# Altium PCB controller_V1.0.PcbDoc (part 7 of 8)
Units mm, origin at the board's own origin, x right, y up, seen from the top; angles counter-clockwise.
Board outline 284.13 x 175.13 mm, 4 copper layers (Top Layer, GND, VCC, Bottom Layer); 496 components, 415 nets, 1682 pads, 750 vias.
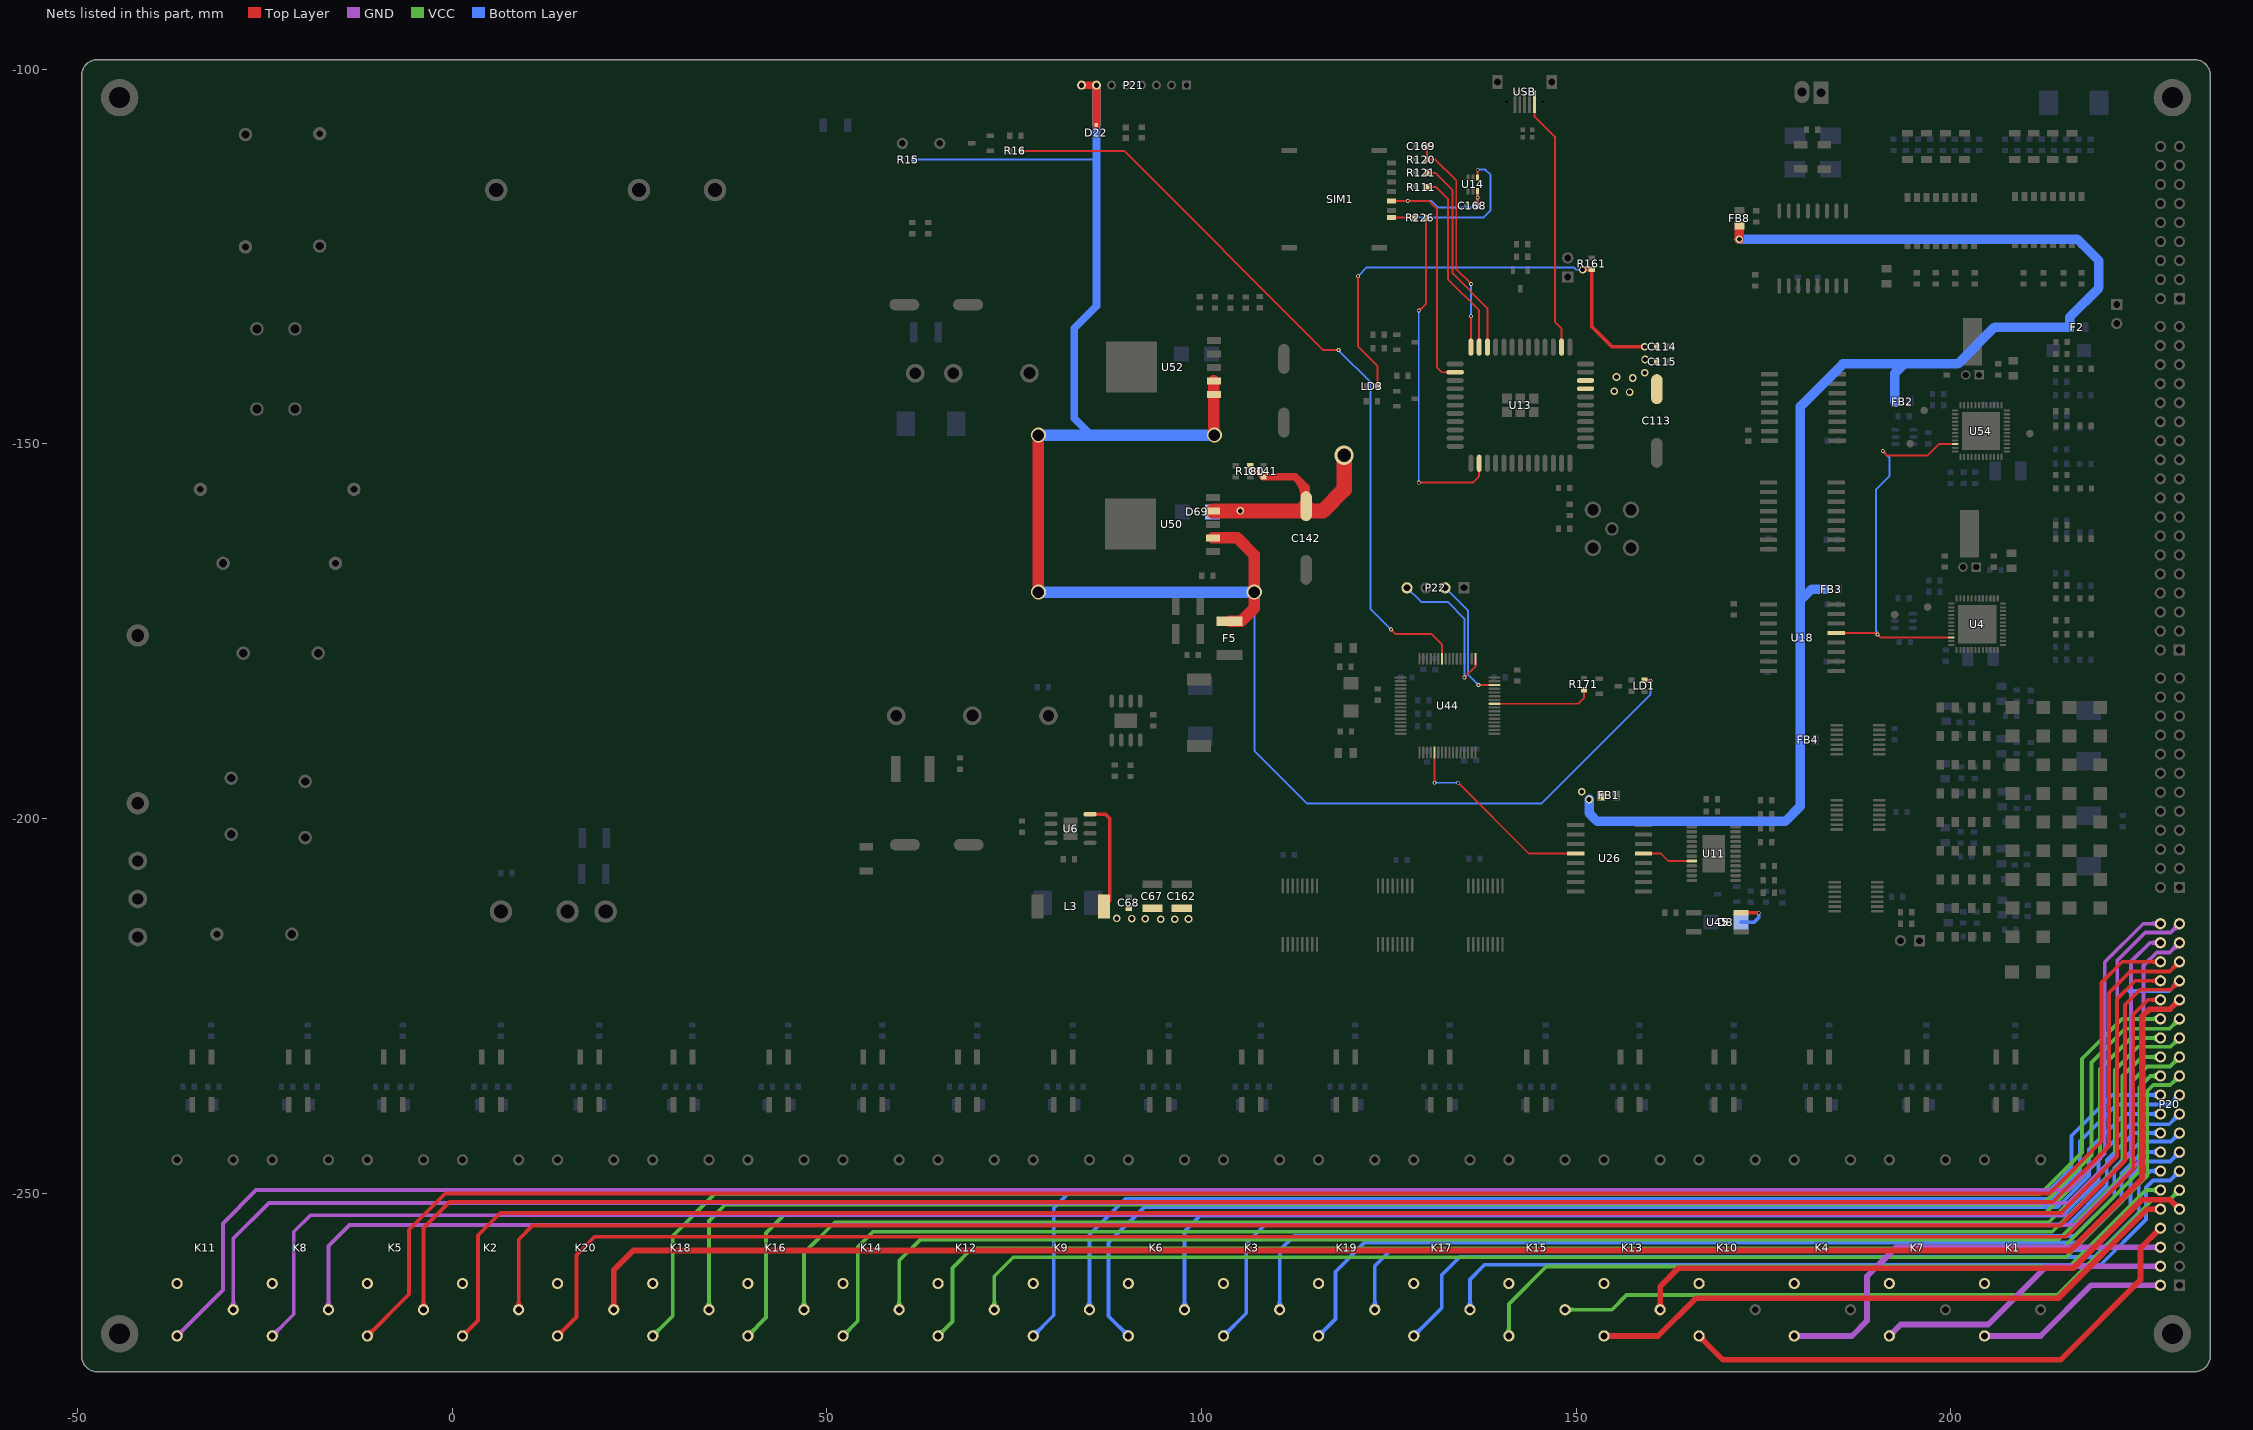
[diagram p9: the nets of this part, all layers, seen from the top]

## Via types
v1: diameter 0.508, hole 0.305, Top Layer to Bottom Layer, tented both sides, 596 vias
v2: diameter 1.016, hole 0.635, Top Layer to Bottom Layer, tented both sides, 65 vias
v3: diameter 0.6, hole 0.3, Top Layer to Bottom Layer, 50 vias
v4: diameter 0.762, hole 0.508, Top Layer to Bottom Layer, tented both sides, 29 vias
v5: diameter 2.032, hole 1.524, Top Layer to Bottom Layer, tented both sides, 4 vias
v6: diameter 3.048, hole 2.032, Top Layer to Bottom Layer, tented both sides, 3 vias
v7: diameter 1.5, hole 1, Top Layer to Bottom Layer, 2 vias
v8: diameter 2.54, hole 1.778, Top Layer to Bottom Layer, tented both sides, 1 vias

## Nets (pads, with @x,y where several pads share a name; then routed paths per layer and width w, separated by ;. In a path a pad name is that pad's centre, name@x,y a point inside that pad or via, vN(x,y) a via of type N, cw(c..) or ccw(c..) an arc to the next point about the centre after c; other vN are vias at no path point) (continued)
RELAY_A5: K13.1 P20.9 | length 80.5
  Top Layer w0.762: K13.1@160.967,-265.306 ccw(c160.337,-264.676) 161.228,-264.676 ccw(c162.119,-264.676) K13.1@161.489,-265.306 ; K13.1@161.228,-265.567 161.228,-262.458 163.641,-260.045 216.357,-260.045 225.515,-250.888 229.288,-250.888 P20.9@230.546,-252.146 ; P20.9@230.177,-252.146 ccw(c229.287,-252.146) 229.916,-251.516 ccw(c230.546,-250.886) P20.9@230.546,-251.777
RELAY_A6: K15.1 P20.11 | length 92.4
  VCC w0.508: K15.1@148.53,-265.567 154.777,-265.567 156.743,-263.601 214.249,-263.601 226.924,-250.927 228.346,-250.927 229.226,-250.927 P20.11@230.546,-249.606 ; K15.1@148.881,-265.918 cw(c149.728,-266.765) 149.728,-265.567 cw(c149.728,-264.37) K15.1@148.881,-265.216 ; P20.11@230.05,-249.606 cw(c228.853,-249.606) 229.7,-250.453 cw(c230.546,-251.299) P20.11@230.546,-250.102
RELAY_A7: K17.1 P20.13 | length 111
  Bottom Layer w0.508: K17.1@135.482,-265.216 ccw(c134.635,-264.37) 135.832,-264.37 ccw(c137.03,-264.37) K17.1@136.183,-265.216 ; K17.1@135.832,-265.567 135.832,-261.525 137.795,-259.563 220.04,-259.563 226.085,-253.517 226.085,-249.25 227.025,-248.31 229.302,-248.31 P20.13@230.546,-247.066 ; P20.13@230.05,-247.066 cw(c228.853,-247.066) 229.7,-247.913 cw(c230.546,-248.759) P20.13@230.546,-247.562
RELAY_A8: K19.1 P20.15 | length 125.6
  Bottom Layer w0.508: K19.1@122.784,-265.216 ccw(c121.937,-264.37) 123.135,-264.37 ccw(c124.332,-264.37) K19.1@123.485,-265.216 ; K19.1@123.135,-265.567 123.135,-259.745 125.247,-257.632 218.211,-257.632 224.003,-251.841 224.003,-247.853 226.085,-245.77 229.302,-245.77 P20.15@230.546,-244.526 ; P20.15@230.05,-244.526 cw(c228.853,-244.526) 229.7,-245.373 cw(c230.546,-246.219) P20.15@230.546,-245.022
RELAY_A9: K3.1 P20.17 | length 140.5
  Bottom Layer w0.508: K3.1@110.086,-265.216 ccw(c109.24,-264.37) 110.437,-264.37 ccw(c111.634,-264.37) K3.1@110.788,-265.216 ; K3.1@110.437,-265.567 110.437,-257.634 112.344,-255.727 216.535,-255.727 221.844,-250.419 221.844,-246.659 225.386,-243.117 229.415,-243.117 P20.17@230.546,-241.986 ; P20.17@230.05,-241.986 cw(c228.853,-241.986) 229.7,-242.833 cw(c230.546,-243.679) P20.17@230.546,-242.482
RELAY_A10: K6.1 P20.19 | length 155.3
  Bottom Layer w0.508: K6.1@97.389,-265.216 ccw(c96.542,-264.37) 97.739,-264.37 ccw(c98.937,-264.37) K6.1@98.09,-265.216 ; K6.1@97.739,-265.567 97.739,-255.118 99.822,-253.035 214.935,-253.035 219.735,-248.234 219.735,-245.11 224.028,-240.817 229.175,-240.817 P20.19@230.546,-239.446 ; P20.19@230.05,-239.446 cw(c228.853,-239.446) 229.7,-240.293 cw(c230.546,-241.139) P20.19@230.546,-239.942
RELAY_A11: K9.1 P20.21 | length 169.3
  Bottom Layer w0.508: K9.1@84.691,-265.216 ccw(c83.844,-264.37) 85.042,-264.37 ccw(c86.239,-264.37) K9.1@85.392,-265.216 ; K9.1@85.042,-265.567 85.042,-255.572 89.865,-250.749 213.614,-250.749 217.272,-247.091 217.272,-243.078 222.174,-238.176 229.276,-238.176 P20.21@230.546,-236.906 ; P20.21@230.05,-236.906 cw(c228.853,-236.906) 229.7,-237.753 cw(c230.546,-238.599) P20.21@230.546,-237.402
RELAY_A12: K12.1 P20.23 | length 184.2
  VCC w0.508: K12.1@71.993,-265.216 ccw(c71.146,-264.37) 72.344,-264.37 ccw(c73.541,-264.37) K12.1@72.695,-265.216 ; K12.1@72.344,-265.567 72.344,-261.107 74.879,-258.572 215.417,-258.572 226.238,-247.752 226.238,-236.398 227.051,-235.585 229.327,-235.585 P20.23@230.546,-234.366 ; P20.23@230.05,-234.366 cw(c228.853,-234.366) 229.7,-235.213 cw(c230.546,-236.059) P20.23@230.546,-234.862
RELAY_A13: K14.1 P20.25 | length 199.1
  VCC w0.508: K14.1@59.295,-265.216 ccw(c58.449,-264.37) 59.646,-264.37 ccw(c60.844,-264.37) K14.1@59.997,-265.216 ; K14.1@59.646,-265.567 59.646,-259.022 62.484,-256.184 214.427,-256.184 224.13,-246.482 224.13,-235.179 226.212,-233.096 229.276,-233.096 P20.25@230.546,-231.826 ; P20.25@230.05,-231.826 cw(c228.853,-231.826) 229.7,-232.673 cw(c230.546,-233.519) P20.25@230.546,-232.322
RELAY_A14: K16.1 P20.27 | length 213.6
  VCC w0.508: K16.1@46.598,-265.216 ccw(c45.751,-264.37) 46.948,-264.37 ccw(c48.146,-264.37) K16.1@47.299,-265.216 ; K16.1@46.948,-265.567 46.948,-258.004 51.054,-253.898 213.106,-253.898 221.92,-245.085 221.92,-233.553 224.993,-230.48 229.353,-230.48 P20.27@230.546,-229.286 ; P20.27@230.05,-229.286 cw(c228.853,-229.286) 229.7,-230.133 cw(c230.546,-230.979) P20.27@230.546,-229.782
RELAY_A15: K18.1 P20.29 | length 230.4
  VCC w0.508: K18.1@33.9,-265.216 ccw(c33.053,-264.37) 34.251,-264.37 ccw(c35.448,-264.37) K18.1@34.601,-265.216 ; K18.1@34.251,-265.567 34.251,-253.709 36.424,-251.536 212.242,-251.536 218.796,-244.983 218.796,-232.562 223.291,-228.067 229.226,-228.067 P20.29@230.546,-226.746 ; P20.29@230.05,-226.746 cw(c228.853,-226.746) 229.7,-227.593 cw(c230.546,-228.439) P20.29@230.546,-227.242
RELAY_A16: K20.1 P20.31 | length 244.7
  Top Layer w0.762: K20.1@21.292,-265.306 ccw(c20.662,-264.676) 21.553,-264.676 ccw(c22.444,-264.676) K20.1@21.814,-265.306 ; K20.1@21.553,-265.567 21.553,-260.26 24.155,-257.658 215.976,-257.658 225.552,-248.082 225.552,-226.441 226.529,-225.464 228.527,-225.464 228.541,-225.45 229.302,-225.45 P20.31@230.546,-224.206 ; P20.31@230.177,-224.206 cw(c229.287,-224.206) 229.916,-224.836 cw(c230.546,-225.466) P20.31@230.546,-224.575
RELAY_A17: K2.1 P20.33 | length 270.5
  Top Layer w0.508: K2.1@8.504,-265.216 ccw(c7.658,-264.37) 8.855,-264.37 ccw(c10.053,-264.37) K2.1@9.206,-265.216 ; K2.1@8.855,-265.567 8.855,-256.194 10.719,-254.33 214.655,-254.33 223.266,-245.72 223.266,-224.866 225.273,-222.86 229.353,-222.86 P20.33@230.546,-221.666 ; P20.33@230.05,-221.666 cw(c228.853,-221.666) 229.7,-222.513 cw(c230.546,-223.359) P20.33@230.546,-222.162
  Bottom Layer w0.508: 223.825,-223.037 229.175,-223.037 P20.33@230.546,-221.666 ; P20.33@230.05,-221.666 cw(c228.853,-221.666) 229.7,-222.513 cw(c230.546,-223.359) P20.33@230.546,-222.162
RELAY_A18: K5.1 P20.35 | length 275.8
  Top Layer w0.508: K5.1@-4.193,-265.216 ccw(c-5.04,-264.37) -3.843,-264.37 ccw(c-2.645,-264.37) K5.1@-3.492,-265.216 ; K5.1@-3.843,-265.567 -3.843,-254.66 -0.388,-251.206 213.639,-251.206 221.132,-243.713 221.132,-223.266 223.977,-220.421 229.251,-220.421 P20.35@230.546,-219.126 ; P20.35@230.05,-219.126 cw(c228.853,-219.126) 229.7,-219.973 cw(c230.546,-220.819) P20.35@230.546,-219.622
RELAY_A19: K8.1 P20.37 | length 291.1
  GND w0.508: K8.1@-16.891,-265.216 ccw(c-17.738,-264.37) -16.54,-264.37 ccw(c-15.343,-264.37) K8.1@-16.19,-265.216 ; K8.1@-16.54,-265.567 -16.54,-257.078 -13.741,-254.279 216.713,-254.279 225.755,-245.237 225.755,-219.634 227.508,-217.881 229.251,-217.881 P20.37@230.546,-216.586 ; P20.37@230.05,-216.586 cw(c228.853,-216.586) 229.7,-217.433 cw(c230.546,-218.279) P20.37@230.546,-217.082
RELAY_A20: K11.1 P20.39 | length 305.6
  GND w0.508: K11.1@-29.589,-265.216 ccw(c-30.435,-264.37) -29.238,-264.37 ccw(c-28.041,-264.37) K11.1@-28.887,-265.216 ; K11.1@-29.238,-265.567 -29.238,-256.083 -24.488,-251.333 215.722,-251.333 222.25,-244.805 222.25,-218.939 225.975,-215.214 226.136,-215.214 229.378,-215.214 P20.39@230.546,-214.046 ; P20.39@230.05,-214.046 cw(c228.853,-214.046) 229.7,-214.893 cw(c230.546,-215.739) P20.39@230.546,-214.542
RELAY_B1: K1.3 P20.2 | length 29.1
  GND w0.762: K1.3@204.519,-269.067 211.983,-269.067 218.745,-262.306 P20.2@228.006,-262.306 ; K1.3@204.78,-269.328 cw(c205.41,-269.958) 205.41,-269.067 cw(c205.41,-268.176) K1.3@204.78,-268.806 ; P20.2@227.745,-262.567 ccw(c227.116,-263.197) 227.116,-262.306 ccw(c227.116,-261.415) P20.2@227.745,-262.045
RELAY_B2: K4.3 P20.6 | length 60.1
  GND w0.762: K4.3@179.123,-269.067 186.817,-269.067 188.849,-267.035 188.849,-261.112 192.735,-257.226 P20.6@228.006,-257.226 ; K4.3@179.384,-269.328 cw(c180.014,-269.958) 180.014,-269.067 cw(c180.014,-268.176) K4.3@179.384,-268.806 ; P20.6@227.745,-257.487 ccw(c227.116,-258.117) 227.116,-257.226 ccw(c227.116,-256.335) P20.6@227.745,-256.965
RELAY_B3: K7.3 P20.4 | length 42.8
  GND w0.762: K7.3@191.821,-269.067 193.337,-267.551 205.016,-267.551 212.801,-259.766 P20.4@228.006,-259.766 ; K7.3@191.821,-268.698 ccw(c191.821,-267.807) 192.451,-268.437 ccw(c193.081,-269.067) K7.3@192.19,-269.067 ; P20.4@227.745,-260.027 ccw(c227.116,-260.657) 227.116,-259.766 ccw(c227.116,-258.875) P20.4@227.745,-259.505
RELAY_B4: K10.3 P20.8 | length 75.7
  Top Layer w0.508: K10.3@166.426,-269.067 K10.3@166.7,-269.067
  Top Layer w0.762: K10.3@166.426,-269.436 cw(c166.426,-270.327) 167.056,-269.697 cw(c167.685,-269.067) K10.3@166.795,-269.067 ; K10.3@166.426,-269.067 169.621,-272.263 214.655,-272.263 225.349,-261.569 225.349,-257.343 P20.8@228.006,-254.686 ; P20.8@227.637,-254.686 cw(c226.747,-254.686) 227.376,-255.316 cw(c228.006,-255.946) P20.8@228.006,-255.055
RELAY_B5: K13.3 P20.10 | length 84.1
  Top Layer w0.762: K13.3@153.728,-269.067 160.96,-269.067 165.994,-264.033 214.376,-264.033 226.263,-252.146 P20.10@228.006,-252.146 ; K13.3@153.989,-269.328 cw(c154.619,-269.958) 154.619,-269.067 cw(c154.619,-268.176) K13.3@153.989,-268.806 ; P20.10@227.745,-252.407 ccw(c227.116,-253.037) 227.116,-252.146 ccw(c227.116,-251.255) P20.10@227.745,-251.885
RELAY_B6: K15.3 P20.12 | length 101.3
  VCC w0.508: K15.3@140.679,-268.716 ccw(c139.833,-267.87) 141.03,-267.87 ccw(c142.228,-267.87) K15.3@141.381,-268.716 ; K15.3@141.03,-269.067 141.03,-264.811 146.025,-259.817 215.849,-259.817 226.06,-249.606 P20.12@228.006,-249.606 ; P20.12@227.656,-249.957 ccw(c226.809,-250.803) 226.809,-249.606 ccw(c226.809,-248.408) P20.12@227.656,-249.255
RELAY_B7: K17.3 P20.14 | length 117.5
  Bottom Layer w0.508: K17.3@128.332,-269.067 132.08,-265.32 132.08,-260.934 134.468,-258.547 219.177,-258.547 225.12,-252.603 225.12,-248.615 226.67,-247.066 P20.14@228.006,-247.066 ; K17.3@128.332,-268.571 ccw(c128.332,-267.374) 129.179,-268.22 ccw(c130.026,-269.067) K17.3@128.828,-269.067 ; P20.14@227.656,-247.417 ccw(c226.809,-248.263) 226.809,-247.066 ccw(c226.809,-245.868) P20.14@227.656,-246.715
RELAY_B8: K19.3 P20.16 | length 132.2
  Bottom Layer w0.508: K19.3@115.635,-269.067 117.881,-266.82 117.881,-260.502 121.768,-256.616 217.348,-256.616 222.809,-251.155 222.809,-247.345 225.628,-244.526 P20.16@228.006,-244.526 ; K19.3@115.635,-268.571 ccw(c115.635,-267.374) 116.481,-268.22 ccw(c117.328,-269.067) K19.3@116.131,-269.067 ; P20.16@227.656,-244.877 ccw(c226.809,-245.723) 226.809,-244.526 ccw(c226.809,-243.328) P20.16@227.656,-244.175
RELAY_B9: K3.3 P20.18 | length 147.5
  Bottom Layer w0.508: K3.3@102.937,-269.067 105.969,-266.035 105.969,-256.718 108.509,-254.178 215.697,-254.178 220.828,-249.047 220.828,-245.618 224.46,-241.986 P20.18@228.006,-241.986 ; K3.3@102.937,-268.571 ccw(c102.937,-267.374) 103.784,-268.22 ccw(c104.63,-269.067) K3.3@103.433,-269.067 ; P20.18@227.656,-242.337 ccw(c226.809,-243.183) 226.809,-241.986 ccw(c226.809,-240.788) P20.18@227.656,-241.635
RELAY_B10: K6.3 P20.20 | length 166.8
  Bottom Layer w0.508: K6.3@89.743,-269.067 ccw(c88.546,-269.067) 89.393,-268.22 ccw(c90.239,-267.374) K6.3@90.239,-268.571 ; K6.3@90.239,-269.067 87.605,-266.433 87.605,-256.616 92.38,-251.841 214.3,-251.841 218.491,-247.65 218.491,-244.196 223.241,-239.446 P20.20@228.006,-239.446 ; P20.20@227.656,-239.797 ccw(c226.809,-240.643) 226.809,-239.446 ccw(c226.809,-238.248) P20.20@227.656,-239.095
RELAY_B11: K9.3 P20.22 | length 178.5
  Bottom Layer w0.508: K9.3@77.542,-269.067 80.289,-266.319 80.289,-251.993 82.55,-249.733 213.131,-249.733 216.129,-246.736 216.129,-242.341 221.564,-236.906 P20.22@228.006,-236.906 ; K9.3@77.542,-268.571 ccw(c77.542,-267.374) 78.388,-268.22 ccw(c79.235,-269.067) K9.3@78.038,-269.067 ; P20.22@227.656,-237.257 ccw(c226.809,-238.103) 226.809,-236.906 ccw(c226.809,-235.708) P20.22@227.656,-236.555
RELAY_B12: K12.3 P20.24 | length 192.1
  VCC w0.508: K12.3@64.844,-269.067 66.751,-267.16 66.751,-259.994 69.342,-257.404 214.909,-257.404 225.171,-247.142 225.171,-235.864 226.67,-234.366 P20.24@228.006,-234.366 ; K12.3@64.844,-268.571 ccw(c64.844,-267.374) 65.691,-268.22 ccw(c66.537,-269.067) K12.3@65.34,-269.067 ; P20.24@227.656,-234.717 ccw(c226.809,-235.563) 226.809,-234.366 ccw(c226.809,-233.168) P20.24@227.656,-234.015
RELAY_B13: K14.3 P20.26 | length 207.5
  VCC w0.508: K14.3@52.146,-269.067 54.127,-267.086 54.127,-257.2 56.159,-255.168 213.563,-255.168 222.961,-245.77 222.961,-234.391 225.527,-231.826 P20.26@228.006,-231.826 ; K14.3@52.146,-268.571 ccw(c52.146,-267.374) 52.993,-268.22 ccw(c53.84,-269.067) K14.3@52.642,-269.067 ; P20.26@227.656,-232.177 ccw(c226.809,-233.023) 226.809,-231.826 ccw(c226.809,-230.628) P20.26@227.656,-231.475
RELAY_B14: K16.3 P20.28 | length 222.4
  VCC w0.508: K16.3@39.448,-269.067 41.885,-266.631 41.885,-255.321 44.399,-252.806 212.522,-252.806 219.939,-245.389 219.939,-233.426 224.079,-229.286 P20.28@228.006,-229.286 ; K16.3@39.448,-268.571 ccw(c39.448,-267.374) 40.295,-268.22 ccw(c41.142,-269.067) K16.3@39.944,-269.067 ; P20.28@227.656,-229.637 ccw(c226.809,-230.483) 226.809,-229.286 ccw(c226.809,-228.088) P20.28@227.656,-228.935
RELAY_B15: K18.3 P20.30 | length 236.1
  VCC w0.508: K18.3@26.751,-269.067 29.413,-266.405 29.413,-255.727 35.001,-250.139 211.963,-250.139 217.526,-244.577 217.526,-232.08 222.86,-226.746 P20.30@228.006,-226.746 ; K18.3@26.751,-268.571 ccw(c26.751,-267.374) 27.597,-268.22 ccw(c28.444,-269.067) K18.3@27.247,-269.067 ; P20.30@227.656,-227.097 ccw(c226.809,-227.943) 226.809,-226.746 ccw(c226.809,-225.548) P20.30@227.656,-226.395
RELAY_B16: K20.3 P20.32 | length 253.3
  Top Layer w0.508: K20.3@14.053,-269.067 16.561,-266.559 16.561,-258.267 18.999,-255.829 215.392,-255.829 224.384,-246.837 224.384,-226.162 226.339,-224.206 P20.32@228.006,-224.206 ; K20.3@14.053,-268.571 ccw(c14.053,-267.374) 14.9,-268.22 ccw(c15.746,-269.067) K20.3@14.549,-269.067 ; P20.32@227.656,-224.557 ccw(c226.809,-225.403) 226.809,-224.206 ccw(c226.809,-223.008) P20.32@227.656,-223.855
RELAY_B17: K2.3 P20.34 | length 269.9
  Top Layer w0.508: K2.3@1.355,-269.067 3.429,-266.993 3.429,-255.626 6.401,-252.654 214.732,-252.654 218.669,-248.717 ; K2.3@1.355,-268.571 ccw(c1.355,-267.374) 2.202,-268.22 ccw(c3.049,-269.067) K2.3@1.851,-269.067 ; 218.084,-249.301 218.669,-248.717 ; P20.34@227.656,-222.017 ccw(c226.809,-222.863) 226.809,-221.666 ccw(c226.809,-220.468) P20.34@227.656,-221.315 ; P20.34@228.006,-221.666 224.638,-221.666 222.225,-224.079 222.225,-245.161 218.669,-248.717
RELAY_B18: K5.3 P20.36 | length 281.3
  Top Layer w0.508: K5.3@-11.343,-269.067 -5.791,-263.516 -5.791,-254.889 -0.94,-250.038 213.182,-250.038 220.142,-243.078 220.142,-221.894 222.91,-219.126 P20.36@228.006,-219.126 ; K5.3@-11.343,-268.571 ccw(c-11.343,-267.374) -10.496,-268.22 ccw(c-9.649,-269.067) K5.3@-10.847,-269.067 ; P20.36@227.656,-219.477 ccw(c226.809,-220.323) 226.809,-219.126 ccw(c226.809,-217.928) P20.36@227.656,-218.775
RELAY_B19: K8.3 P20.38 | length 299
  GND w0.508: K8.3@-24.04,-269.067 -21.158,-266.185 -21.158,-255.168 -18.948,-252.959 215.875,-252.959 224.079,-244.754 224.079,-219.1 226.593,-216.586 P20.38@228.006,-216.586 ; K8.3@-24.04,-268.571 ccw(c-24.04,-267.374) -23.194,-268.22 ccw(c-22.347,-269.067) K8.3@-23.544,-269.067 ; P20.38@227.656,-216.937 ccw(c226.809,-217.783) 226.809,-216.586 ccw(c226.809,-215.388) P20.38@227.656,-216.235
RELAY_B20: K11.3 P20.40 | length 311.5
  GND w0.508: K11.3@-36.738,-269.067 -30.632,-262.962 -30.632,-254.051 -26.187,-249.606 215.671,-249.606 220.574,-244.704 220.574,-219.177 225.704,-214.046 P20.40@228.006,-214.046 ; K11.3@-36.738,-268.571 ccw(c-36.738,-267.374) -35.891,-268.22 ccw(c-35.045,-269.067) K11.3@-36.242,-269.067 ; P20.40@227.656,-214.397 ccw(c226.809,-215.243) 226.809,-214.046 ccw(c226.809,-212.848) P20.40@227.656,-213.695
RELAY_C1: K1.2
RELAY_C2: K4.2
RELAY_C3: K7.2
RELAY_C4: K10.2
RELAY_C5: K13.2
RELAY_C6: K15.2
RELAY_C7: K17.2
RELAY_C8: K19.2
RELAY_C9: K3.2
RELAY_C10: K6.2
RELAY_C11: K9.2
RELAY_C12: K12.2
RELAY_C13: K14.2
RELAY_C14: K16.2
RELAY_C15: K18.2
RELAY_C16: K20.2
RELAY_C17: K2.2
RELAY_C18: K5.2
RELAY_C19: K8.2
RELAY_C20: K11.2
SCLK: U4.22 U18.13 U54.22 | length 54.9
  Top Layer w0.254: U18.13@184.732,-175.235 190.045,-175.235 190.627,-175.816 U4.22@200.095,-175.816 ; U18.13@185.716,-175.342 cw(c185.976,-175.603) 185.976,-175.235 cw(c185.976,-174.867) U18.13@185.716,-175.127 ; v1@190.246,-175.565 cw(c190.246,-175.878) 190.467,-175.656 ; v1@190.373,-175.438 ccw(c190.673,-175.438) 190.461,-175.65 ; v1@190.939,-151.079 cw(c190.939,-151.386) 191.156,-151.169 cw(c191.373,-150.952) v1@191.066,-150.952 ; v1(190.939,-150.952) 191.549,-151.562 196.901,-151.562 198.427,-150.035 U54.22@200.603,-150.035
  Bottom Layer w0.254: 190.043,-175.254 ccw(c190.43,-175.254) v1@190.156,-175.528 ; 190.043,-174.641 ccw(c191.043,-174.641) v1@190.336,-175.348 ; v1(190.246,-175.438) 190.043,-175.235 190.043,-156.083 191.821,-154.305 191.821,-151.834 v1(190.939,-150.952) ; v1@190.939,-151.079 cw(c190.939,-151.386) 191.156,-151.169 cw(c191.373,-150.952) v1@191.066,-150.952
SCLK_AO: U11.8 U26.13 | length 7.8
  Top Layer w0.254: U26.13@159.001,-204.673 161.315,-204.673 162.316,-205.674 U11.8@165.449,-205.674 ; U26.13@159.985,-204.781 cw(c160.246,-205.041) 160.246,-204.673 cw(c160.246,-204.305) U26.13@159.985,-204.565 ; U11.8@164.88,-205.743 ccw(c164.712,-205.91) 164.712,-205.674 ccw(c164.712,-205.437) U11.8@164.88,-205.604
SCLK_AO_MCU: U26.4 U44.21 | length 29.3
  Top Layer w0.254: v1@131.001,-195.133 ccw(c130.784,-194.916) 131.091,-194.916 ccw(c131.398,-194.916) v1@131.181,-195.133 ; v1(131.091,-195.223) U44.21@131.091,-191.178 ; v1@134.264,-195.35 cw(c134.264,-195.656) 134.481,-195.44 cw(c134.698,-195.223) v1@134.391,-195.223 ; v1(134.264,-195.223) 143.715,-204.673 145.415,-204.673 U26.4@149.959,-204.673 ; U26.4@148.975,-204.781 ccw(c148.715,-205.041) 148.715,-204.673 ccw(c148.715,-204.305) U26.4@148.975,-204.565
  Bottom Layer w0.254: v1(131.091,-195.223) v1(134.264,-195.223) ; v1@131.181,-195.313 cw(c131.398,-195.529) 131.398,-195.223 cw(c131.398,-194.916) v1@131.181,-195.133 ; v1@134.175,-195.313 ccw(c133.958,-195.529) 133.958,-195.223 ccw(c133.958,-194.916) v1@134.175,-195.133
SIM_CLK: C169.1 R120.2 U13.13 | length 35
  Top Layer w0.254: R120.2@129.939,-111.807 ccw(c129.552,-111.42) 130.099,-111.42 ; C169.1@129.941,-110.494 cw(c129.56,-110.875) 130.099,-110.875 cw(c130.637,-110.875) C169.1@130.256,-110.494 ; 130.099,-111.432 ccw(c130.628,-111.432) R120.2@130.254,-111.807 ; C169.1@130.099,-110.261 130.099,-112.037 R120.2@130.096,-112.039 131.216,-112.039 134.01,-114.833 134.01,-126.67 v1(135.992,-128.651) ; R120.2@130.254,-112.197 cw(c130.635,-112.578) 130.635,-112.039 cw(c130.635,-111.501) R120.2@130.254,-111.882 ; U13.13@135.828,-136.116 ccw(c135.49,-135.778) 135.968,-135.778 ccw(c136.446,-135.778) U13.13@136.108,-136.116 ; v1@135.865,-128.651 ccw(c135.558,-128.651) 135.775,-128.434 ccw(c135.992,-128.217) v1@135.992,-128.524 ; v1@135.878,-133.035 cw(c135.661,-133.252) 135.968,-133.252 cw(c136.274,-133.252) v1@136.057,-133.035 ; U13.13@135.968,-137.081 v1(135.968,-132.945)
  Bottom Layer w0.254: v1@135.878,-132.855 ccw(c135.661,-132.638) 135.968,-132.638 ccw(c136.274,-132.638) v1@136.057,-132.855 ; v1(135.968,-132.945) 135.968,-128.675 v1(135.992,-128.651) ; 135.968,-129.016 cw(c136.356,-129.016) v1@136.081,-128.741
SIM_DATA: R121.2 U13.11 | length 28.8
  Top Layer w0.254: R121.2@130.096,-113.817 131.191,-113.817 133.528,-116.154 133.528,-127.229 138.168,-131.868 U13.11@138.168,-137.081 ; R121.2@130.254,-113.975 cw(c130.635,-114.356) 130.635,-113.817 cw(c130.635,-113.279) R121.2@130.254,-113.66 ; U13.11@138.028,-136.116 ccw(c137.69,-135.778) 138.168,-135.778 ccw(c138.646,-135.778) U13.11@138.308,-136.116
SIM_PRE: R226.1 SIM1.8 U14.1 | length 26.4
  Top Layer w0.254: SIM1.8@125.346,-119.786 v1(127.533,-119.786) R226.1@128.473,-119.786 ; SIM1.8@125.776,-119.926 cw(c126.114,-120.264) 126.114,-119.786 cw(c126.114,-119.308) SIM1.8@125.776,-119.646 ; v1@127.444,-119.876 ccw(c127.227,-120.093) 127.227,-119.786 ccw(c127.227,-119.48) v1@127.444,-119.697 ; v1@127.623,-119.876 cw(c127.84,-120.093) 127.84,-119.786 cw(c127.84,-119.48) v1@127.623,-119.697 ; R226.1@128.316,-119.944 ccw(c127.935,-120.325) 127.935,-119.786 ccw(c127.935,-119.248) R226.1@128.316,-119.629 ; v1@136.778,-113.488 cw(c136.561,-113.705) 136.868,-113.705 cw(c137.174,-113.705) v1@136.957,-113.488 ; U14.1@136.868,-114.442 v1(136.868,-113.399)
  Bottom Layer w0.254: v1(127.533,-119.786) 137.617,-119.786 138.582,-118.821 138.582,-114.071 137.897,-113.386 v1@136.881,-113.386 ; v1@127.623,-119.876 cw(c127.84,-120.093) 127.84,-119.786 cw(c127.84,-119.48) v1@127.623,-119.697 ; v1@136.957,-113.488 cw(c137.206,-113.737) 137.206,-113.386 ; v1@136.957,-113.309 ccw(c137.143,-113.123) 137.143,-113.386
SIM_RST: R111.2 U13.12 | length 26.6
  Top Layer w0.254: R111.2@130.096,-115.722 131.318,-115.722 132.893,-117.297 132.893,-127.991 137.068,-132.165 U13.12@137.068,-137.081 ; R111.2@130.254,-115.88 cw(c130.635,-116.261) 130.635,-115.722 cw(c130.635,-115.184) R111.2@130.254,-115.565 ; U13.12@136.928,-136.116 ccw(c136.59,-135.778) 137.068,-135.778 ccw(c137.546,-135.778) U13.12@137.208,-136.116
SIOUT0: D8.2 U45.4 | length 5.7
  Top Layer w0.508: U45.4@172.032,-212.573 v1(174.396,-212.573)
  Bottom Layer w0.508: D8.2@171.993,-213.843 173.761,-213.843 174.396,-213.208 v1(174.396,-212.573)
SPEAKER: R16.2 U44.58 | length 105.9
  Top Layer w0.254: R16.2@75.922,-110.896 89.687,-110.896 116.256,-137.465 v1(118.288,-137.465) ; R16.2@76.08,-111.054 cw(c76.46,-111.435) 76.46,-110.896 cw(c76.46,-110.358) R16.2@76.08,-110.739 ; v1@118.198,-137.555 ccw(c117.981,-137.771) 117.981,-137.465 ccw(c117.981,-137.158) v1@118.198,-137.375 ; v1@125.292,-174.898 cw(c125.292,-175.205) 125.509,-174.988 cw(c125.726,-174.771) v1@125.419,-174.771 ; v1(125.292,-174.771) 125.908,-175.387 130.708,-175.387 132.091,-176.77 U44.58@132.091,-178.678
  Bottom Layer w0.254: v1@118.288,-137.592 cw(c118.288,-137.898) 118.505,-137.682 cw(c118.721,-137.465) v1@118.415,-137.465 ; v1(118.288,-137.465) 122.58,-141.757 122.58,-172.06 v1(125.292,-174.771) ; v1@125.165,-174.771 ccw(c124.859,-174.771) 125.075,-174.555 ccw(c125.292,-174.338) v1@125.292,-174.644
STATUS: R171.1 U44.41 | length 14.2
  Top Layer w0.254: U44.41@139.091,-184.678 150.322,-184.678 151.054,-183.947 R171.1@151.054,-182.829 ; R171.1@150.896,-182.987 cw(c150.515,-183.368) 151.054,-183.368 cw(c151.592,-183.368) R171.1@151.211,-182.987
SWCLK: P22.4 U44.49 | length 21.3
  Top Layer w0.254: v1(135.091,-181.167) 136.591,-179.667 U44.49@136.591,-178.678 ; v1@135.091,-181.04 ccw(c135.091,-180.733) 135.308,-180.95 ccw(c135.525,-181.167) v1@135.218,-181.167
  Bottom Layer w0.254: P22.4@127.429,-169.215 129.309,-171.094 132.867,-171.094 135.091,-173.318 v1(135.091,-181.167) ; v1@135.001,-181.077 ccw(c134.784,-180.86) 135.091,-180.86 ccw(c135.398,-180.86) v1@135.181,-181.077
SWDIO: P22.2 U44.46 | length 17.9
  Top Layer w0.254: v1(136.966,-182.178) U44.46@139.091,-182.178 ; v1@137.056,-182.268 cw(c137.273,-182.485) 137.273,-182.178 cw(c137.273,-181.872) v1@137.056,-182.088
  Bottom Layer w0.254: P22.2@132.509,-169.215 135.591,-172.297 135.591,-180.803 v1(136.966,-182.178) ; v1@136.839,-182.178 ccw(c136.533,-182.178) 136.749,-181.961 ccw(c136.966,-181.745) v1@136.966,-182.051
VBAT: C113.1 C114.2 C115.2 C141.2 C142.1 D69.2 LD3.1 R161.2 R180.1 U13.42 U13.43 U50.4 | length 109.8
  Top Layer w0.254: v1@120.814,-127.699 cw(c120.597,-127.916) 120.904,-127.916 cw(c121.211,-127.916) v1@120.994,-127.699 ; 120.904,-129.21 120.904,-129.54 ; v1(120.904,-127.61) 120.904,-129.54 ; LD3.1@123.36,-142.058 ccw(c122.979,-141.677) 123.518,-141.677 ccw(c124.056,-141.677) LD3.1@123.675,-142.058 ; LD3.1@123.518,-142.291 123.518,-139.647 120.904,-137.033 120.904,-129.54
  Top Layer w0.508: R180.1@106.5,-152.907 108,-154.407 C141.2@108.278,-154.407 ; R180.1@106.671,-152.907 ccw(c107.083,-152.907) R180.1@106.792,-153.199 ; 107.692,-154.099 ccw(c108.203,-153.589) C141.2@108.203,-154.311 ; v2@150.951,-126.671 R161.2@152.093,-126.671 152.093,-134.338 154.788,-137.033 v2(159.182,-137.033) ; v2@151.056,-126.926 cw(c151.67,-127.54) R161.2@151.67,-126.671 ; v2@159.002,-137.213 ccw(c158.569,-137.646) 158.569,-137.033 ccw(c158.569,-136.42) v2@159.002,-136.853
  Top Layer w1.016: C141.2@108.278,-154.407 112.519,-154.407 113.967,-155.854 C142.1@113.967,-158.31 ; 112.673,-154.56 cw(c110.16,-157.072) C142.1@113.713,-157.072
  Top Layer w2.032: U50.4@101.521,-158.938 v2(105.181,-158.938) C142.1@113.339,-158.938 ; C142.1@113.967,-158.31 C142.1@113.339,-158.938 ; v8(119.05,-151.511) 119.05,-156.108 116.22,-158.938 C142.1@113.339,-158.938
  Bottom Layer w0.254: v1(120.904,-127.61) 122.072,-126.441 149.705,-126.441 150.01,-126.746 v2(150.876,-126.746) ; v1@120.904,-127.483 ccw(c120.904,-127.176) 121.121,-127.393 ccw(c121.338,-127.61) v1@121.031,-127.61
  Bottom Layer w1.524: D69.2@101.457,-159.08 v2@105.065,-159.08
  other v2: 157.15,-143.078 155.092,-142.977 157.582,-141.199 155.397,-141.072 159.182,-140.487 159.212,-138.735
VBUS: U13.2 USB.1 | length 35
  Top Layer w0.254: USB.1@144.435,-104.326 144.435,-106.233 147.168,-108.966 147.168,-133.706 148.068,-134.606 U13.2@148.068,-137.081 ; U13.2@147.928,-136.116 ccw(c147.59,-135.778) 148.068,-135.778 ccw(c148.546,-135.778) U13.2@148.208,-136.116
VCC_5V: D22.2 F5.2 LD1.1 P21.7 P21.8 R15.1 U50.2 U52.1 U52.2 | length 275.9
  Top Layer w0.254: LD1.1@159.131,-181.559 159.182,-181.61 v1(159.944,-181.61) ; LD1.1@159.364,-181.717 cw(c159.622,-181.975) 159.622,-181.61 ; LD1.1@159.364,-181.402 ccw(c159.867,-180.898) v1@159.867,-181.61 ; v1@159.854,-181.7 ccw(c159.637,-181.917) 159.637,-181.61 ccw(c159.637,-181.303) v1@159.854,-181.52
  Top Layer w1.016: P21.8@83.991,-102.108 P21.7@85.991,-102.108 85.991,-107.385 D22.2@85.951,-107.425
  Top Layer w1.524: v5(78.229,-169.774) v5(78.229,-148.819) ; U50.2@101.521,-162.538 104.776,-162.538 107.058,-164.821 v5(107.058,-169.774) 107.058,-171.933 105.316,-173.675 F5.2@103.756,-173.675 ; v5@101.648,-148.742 U52.1@101.648,-143.383 U52.2@101.648,-141.583
  Bottom Layer w0.254: R15.1@61.592,-112.039 76.53,-112.039 ; R15.1@61.75,-112.197 cw(c62.131,-112.578) 62.131,-112.039 cw(c62.131,-111.501) R15.1@61.75,-111.882 ; 85.242,-112.039 76.53,-112.039 ; 85.991,-112.37 85.66,-112.039 76.53,-112.039 ; v5(107.058,-169.774) 107.058,-190.98 114.097,-198.018 145.364,-198.018 159.944,-183.439 v1(159.944,-181.61) ; v1@159.854,-181.7 cw(c159.637,-181.917) 159.944,-181.917 cw(c160.25,-181.917) v1@160.034,-181.7
  Bottom Layer w1.016: 85.268,-148.819 83.033,-146.583 83.033,-134.544 85.991,-131.586 85.991,-112.37 P21.7@85.991,-102.108
  Bottom Layer w1.524: v5(78.229,-169.774) v5(107.058,-169.774) ; v5(78.229,-148.819) 85.268,-148.819 v5(101.724,-148.819)
VCC_5V_ISO: C67.1 C68.1 C162.1 F2.1 FB1.1 FB2.1 FB3.1 FB4.1 FB8.2 L3.2 U6.4 | length 210.6
  Top Layer w0.508: U6.4@85.122,-199.441 87.196,-199.441 87.754,-200 87.754,-210.977 L3.2@86.992,-211.74
  Top Layer w1.27: v2(171.803,-122.685) FB8.2@171.803,-120.897
  Bottom Layer w1.27: v2(151.74,-197.46) 151.74,-199.288 152.832,-200.381 177.927,-200.381 179.959,-198.349 FB4.1@179.959,-189.509 179.959,-170.866 ; v2(171.803,-122.685) 216.919,-122.685 219.786,-125.552 219.786,-129.184 215.872,-133.099 215.872,-133.761 F2.1@215.872,-134.417 205.867,-134.417 200.965,-139.319 193.802,-139.319 ; FB3.1@183.032,-169.393 181.432,-169.393 179.959,-170.866 ; FB2.1@192.532,-144.348 192.532,-140.589 193.802,-139.319 ; 179.959,-170.866 179.959,-163.195 179.959,-144.983 185.623,-139.319 193.802,-139.319
  other v2: 94.564,-213.462 96.418,-213.462 98.273,-213.411 92.507,-213.385 90.678,-213.36 88.697,-213.335 150.749,-196.418
VEXT: R226.2 U13.24 | length 49.4
  Top Layer w0.254: v1(129.007,-155.169) 136.22,-155.169 137.068,-154.321 U13.24@137.068,-152.581 ; v1@129.007,-132.258 129.973,-131.291 R226.2@129.973,-119.786 ; v1@129.007,-132.055 ccw(c129.007,-131.564) 129.353,-131.911 ; v1@129.096,-155.258 cw(c129.313,-155.475) 129.313,-155.169 cw(c129.313,-154.862) v1@129.096,-155.079 ; R226.2@129.816,-120.019 cw(c129.435,-120.4) 129.973,-120.4 cw(c130.512,-120.4) R226.2@130.131,-120.019 ; U13.24@136.928,-153.546 cw(c136.59,-153.884) 137.068,-153.884 cw(c137.546,-153.884) U13.24@137.208,-153.546
  Bottom Layer w0.254: v1@128.917,-155.079 ccw(c128.7,-154.862) 129.007,-154.862 ccw(c129.313,-154.862) v1@129.096,-155.079 ; v1@128.917,-132.271 cw(c128.7,-132.488) 129.007,-132.488 cw(c129.313,-132.488) v1@129.096,-132.271 ; v1(129.007,-155.169) v1(129.007,-132.182)
VSIM: C168.2 SIM1.1 U13.14 U14.6 | length 48.2
  Top Layer w0.254: SIM1.1@125.346,-117.566 v1(127.533,-117.566) 130.368,-117.566 131.445,-118.643 131.445,-139.827 132.049,-140.431 U13.14@133.868,-140.431 ; SIM1.1@125.776,-117.706 cw(c126.114,-118.044) 126.114,-117.566 cw(c126.114,-117.088) SIM1.1@125.776,-117.426 ; v1@127.444,-117.656 ccw(c127.227,-117.873) 127.227,-117.566 ccw(c127.227,-117.26) v1@127.444,-117.477 ; v1@127.623,-117.656 cw(c127.84,-117.873) 127.84,-117.566 cw(c127.84,-117.26) v1@127.623,-117.477 ; U13.14@132.903,-140.571 ccw(c132.565,-140.909) 132.565,-140.431 ccw(c132.565,-139.953) U13.14@132.903,-140.291 ; C168.2@136.724,-118.004 ccw(c136.378,-117.658) 136.868,-117.658 ; v1@136.778,-117.184 cw(c136.561,-117.401) 136.868,-117.401 cw(c137.174,-117.401) v1@136.957,-117.184 ; v1@136.778,-117.004 ccw(c136.561,-116.787) 136.868,-116.787 ccw(c137.174,-116.787) v1@136.957,-117.004 ; 136.868,-117.589 ccw(c137.455,-117.589) C168.2@137.04,-118.004 ; U14.6@136.868,-116.292 v1(136.868,-117.094) 136.868,-118.223 C168.2@136.882,-118.237
  Bottom Layer w0.254: v1(127.533,-117.566) 130.698,-117.566 131.597,-118.466 136.068,-118.466 136.868,-117.666 v1(136.868,-117.094) ; v1@127.623,-117.656 cw(c127.84,-117.873) 127.84,-117.566 cw(c127.84,-117.26) v1@127.623,-117.477 ; v1@136.778,-117.184 cw(c136.561,-117.401) 136.868,-117.401 cw(c137.174,-117.401) v1@136.957,-117.184
pads on no net: P21.3 P21.6 SIM1.6 T1.1 T2.1 T3.1 T4.1 U1.3 U1.5 U2.12 U2.13 U2.14 U3.12 U3.13 U3.14 U4.17 U4.18 U4.19 U4.41 U4.42 U4.43 U4.44 U6.2 U6.3 U7.12 U7.13 U7.14 U10.5 U10.6 U10.11 U10.12 U11.6 U11.17 U11.18 U11.23 U12.11 U12.14 U13.5 U13.8 U13.9 U13.19 U13.20 U13.21 U13.22 U13.23 U13.25 U13.26 U13.28 U13.29 U13.30 U13.31 U13.32 U13.33 U13.38 U13.39 U13.44 U13.96 U13.97 U13.98 U16.4 U16.5 U16.6 U16.7 U16.9 U26.7 U44.2 U44.4 U44.8 U44.9 U44.10 U44.11 U51.2 U51.3 U54.17 U54.18 U54.19 U54.43 U54.44 U56.3 U56.5 USB.0 USB.6 USB.7 X2.3 X3.3
copper on no net:
  other v1: 165.075,-124.003 165.303,-113.919 165.176,-109.144 165.862,-103.276

## Polygon pours and split planes (outlines as drawn)
VCC_5V_ISO on VCC "Top Layer-No Net" (solid, remove dead copper, pour order 1008): 152.984,-195.428 149.936,-195.428 149.555,-195.809 149.301,-196.063 149.301,-197.104 149.301,-218.313 148.26,-219.354 147.269,-220.345 142.164,-220.345 101.93,-220.345 100.889,-219.304 100.381,-218.796 100.381,-212.75 100.381,-212.42 99.517,-211.557 99.39,-211.43 94.945,-211.43 86.817,-211.43 86.36,-211.887 85.877,-212.369 85.877,-213.538 85.877,-223.977 88.341,-226.441 89.535,-226.441 148.438,-226.441 153.213,-221.666 154.864,-220.015 154.864,-198.603 154.864,-197.307 152.883,-195.326
3.3V_MCU on VCC "Top Layer-No Net" (solid, remove dead copper, pour order 1007): 124.714,-178.054 124.765,-178.105 135.026,-178.105 137.185,-178.105 137.897,-178.816 138.811,-179.73 138.811,-182.169 138.811,-190.856 138.074,-191.592 137.592,-192.075 127.203,-192.075 122.784,-192.075 122.225,-191.516 121.641,-190.932 121.641,-187.884 121.641,-180.111 123.342,-178.41 123.698,-178.054 124.714,-178.054
VBAT on VCC "Top Layer-No Net" (solid, remove dead copper, pour order 1006): 118.44,-153.822 157.302,-153.822 161.265,-149.86 161.569,-149.555 161.569,-135.357 161.366,-135.357 159.283,-133.274 156.337,-133.274 155.651,-133.274 154.762,-134.163 153.086,-135.839 153.086,-139.217 153.086,-147.98 151.587,-149.479 151.308,-149.758 132.055,-149.758 117.17,-149.758 116.611,-150.317 116.51,-150.419 116.51,-151.994 116.51,-153.264 116.992,-153.746 117.069,-153.822 118.44,-153.822
3.3V_ISO on VCC "Top Layer-No Net" (solid, remove dead copper, pour order 1005): 111.709,-193.472 118.262,-193.472 118.872,-192.862 119.939,-191.795 119.939,-184.633 119.939,-165.76 121.844,-163.855 122.072,-163.627 132.588,-163.627 135.484,-163.627 138.1,-166.243 144.069,-172.212 151.816,-172.212 167.183,-172.212 169.215,-174.244 172.364,-177.394 172.364,-180.442 172.364,-181.051 173.431,-182.118 175.819,-182.118 177.495,-182.118 178.079,-181.534 178.562,-181.051 178.562,-179.375 178.562,-132.423 179.197,-131.788 181.064,-129.921 195.504,-129.921 219.05,-129.921 219.786,-129.184 220.015,-128.956 220.015,-126.771 177.927,-126.771 175.412,-129.286 172.212,-132.486 172.212,-142.392 172.212,-167.03 171.653,-167.589 170.79,-168.453 157.582,-168.453 147.879,-168.453 139.852,-160.426 137.947,-158.521 128.041,-158.521 119.431,-158.521 116.357,-155.448 113.386,-152.476 113.386,-141.453 113.386,-134.595 111.343,-132.552 110.998,-132.207 102.718,-132.207 102.286,-132.207 100.127,-134.366 99.492,-135.001 99.492,-140.284 99.492,-147.348 103.985,-151.841 111.963,-159.819 111.963,-193.472
VCC_5V_ISO on VCC "Top Layer-No Net" (solid, remove dead copper, pour order 1004): 87.503,-212.344 100.355,-212.344 100.355,-221.92 101.575,-223.139 101.676,-223.037 142.57,-223.037 147.523,-223.037 150.571,-219.989 153.111,-217.449 153.111,-203.403 153.111,-201.32 151.181,-199.39 149.708,-197.917 149.708,-196.113 149.708,-196.037 150.317,-195.428 150.419,-195.326 152.349,-195.326 152.883,-195.326 153.619,-196.063 154.788,-197.231 154.788,-200.685 154.788,-219.456 150.876,-223.368 148.336,-225.908 125.552,-225.908 89.891,-225.908 88.011,-224.028 87.503,-223.52 87.503,-212.344
3.3V_ISO_AD on VCC "Top Layer-No Net" (solid, pour order 1003): 210.185,-135.89 213.131,-135.89 213.843,-136.601 213.843,-140.335 213.843,-168.58 214.732,-169.469 214.782,-169.52 214.782,-178.638 213.233,-178.638 213.03,-178.435 213.03,-177.343 213.03,-162.281 212.522,-161.773 212.369,-161.62 212.369,-159.334 212.369,-138.963 212.217,-138.811 212.014,-138.608 211.328,-138.608 210.795,-138.608 210.668,-138.481 210.185,-137.998 210.185,-135.89
5VA on VCC "Top Layer-No Net" (solid, pour order 1002): 194.666,-143.548 194.678,-143.535 196.19,-143.535 196.418,-143.535 196.799,-143.916 196.835,-143.88 202.803,-143.88 203.236,-143.88 203.886,-143.231 204.681,-142.435 206.891,-142.435 207.434,-142.435 208.864,-143.866 208.991,-143.993 208.991,-145.009 199.923,-145.009 199.06,-145.872 198.907,-146.025 198.907,-149.581 198.907,-150.978 199.009,-151.079 200.177,-152.248 202.803,-152.248 206.654,-152.248 207.239,-152.832 207.188,-152.883 207.188,-153.949 207.188,-154.559 206.553,-155.194 206.477,-155.27 201.767,-155.27 199.771,-155.27 198.145,-156.896 197.891,-157.15 197.891,-165.811 197.891,-166.811 198.755,-167.674 199.28,-168.199 204.775,-168.199 205.74,-168.199 206.045,-168.504 205.938,-168.61 205.938,-170.113 205.926,-170.113 204.826,-171.213 204.722,-171.316 199.568,-171.316 199.568,-176.505 200,-176.936 200.889,-177.825 202.295,-177.825 203.211,-177.825 203.795,-178.41 204.013,-178.627 204.013,-179.857 204.013,-180.01 203.556,-180.467 203.2,-180.823 197.815,-180.823 197.815,-173.406 196.901,-172.491 194.691,-170.282 194.691,-143.548
5VD_F on VCC "Top Layer-No Net" (solid, pour order 1001): 155.677,-195.961 155.677,-206.172 158.826,-209.321 159.283,-209.779 163.271,-209.779 182.22,-209.779 185.395,-206.604 188.697,-203.302 188.697,-160.833 188.697,-139.268 188.163,-138.735 188.112,-138.786 184.252,-138.786 184.061,-138.786 182.956,-139.891 182.778,-140.068 182.778,-145.059 182.778,-204.241 179.527,-207.493 179.451,-207.416 164.973,-207.416 163.576,-207.416 161.341,-205.181 160.35,-204.191 160.35,-198.882 160.35,-196.723 159.842,-196.215 159.588,-195.961 155.677,-195.961
24V_F on VCC "Top Layer-No Net" (solid, pour order 1000): 226.111,-109.271 232.41,-109.271 232.588,-109.449 232.893,-109.753 232.893,-110.49 232.893,-209.245 232.639,-209.499 231.978,-210.16 231.191,-210.16 224.434,-210.16 221.793,-212.801 214.96,-219.634 214.96,-221.844 214.96,-240.589 212.903,-242.646 208.458,-247.091 205.105,-247.091 -38.938,-247.091 -40.818,-245.212 -40.564,-244.958 -40.564,-241.91 -40.564,-241.757 -39.776,-240.97 -39.421,-241.325 59.741,-241.325 59.741,-196.621 61.239,-195.123 61.824,-194.539 66.726,-194.539 68.605,-194.539 70.891,-196.825 72.136,-198.069 72.136,-202.692 72.136,-213.157 68.529,-216.764 66.015,-219.278 66.015,-231.927 66.015,-241.097 66.091,-241.173 71.069,-241.173 71.095,-241.198 133.401,-241.198 133.68,-240.919 134.569,-240.03 202.844,-240.03 206.883,-240.03 210.515,-236.398 210.388,-236.271 210.388,-221.361 210.388,-219.202 213.081,-216.51 224.079,-205.511 224.079,-202.184 224.079,-109.779 224.485,-109.372 224.587,-109.271 226.111,-109.271
AGND on GND "Top Layer-No Net" (solid, remove dead copper, pour order 1010): 168.986,-89.611 169.393,-89.205 242.062,-89.205 242.062,-111.201 247.04,-116.18 246.837,-116.383 246.837,-208.534 243.307,-208.534 240.411,-211.43 239.7,-210.718 228.346,-210.718 224.409,-210.718 221.869,-213.258 214.147,-220.98 214.147,-225.628 214.147,-236.601 210.947,-239.801 209.855,-240.894 206.934,-240.894 -57.709,-240.894 -60.833,-237.769 -62.154,-236.449 -62.154,-222.301 -59.893,-222.301 -58.572,-220.98 -56.921,-219.329 7.315,-219.329 51.232,-219.329 53.797,-216.764 54.051,-216.51 54.051,-186.309 54.051,-183.337 55.651,-181.737 55.829,-181.559 69.901,-181.559 72.111,-181.559 72.72,-182.169 73.965,-183.413 73.965,-189.586 73.965,-193.015 76.505,-195.555 78.537,-197.587 86.995,-197.587 100.711,-197.587 101.067,-197.942 100.99,-198.018 100.99,-203.759 100.99,-222.58 100.025,-223.545 96.749,-223.545 -35.103,-223.545 -36.043,-224.485 -36.347,-224.79 -36.347,-225.984 -36.347,-234.036 -35.992,-234.391 -35.662,-234.721 -34.188,-234.721 207.924,-234.721 209.372,-233.274 209.398,-233.248 209.398,-227.559 209.398,-226.289 207.975,-224.866 206.502,-223.393 206.502,-219.888 206.4,-219.888 205.969,-219.456 200.05,-219.456 196.545,-219.456 196.113,-219.024 196.317,-218.821 196.317,-217.272 196.317,-217.043 195.834,-216.56 195.605,-216.332 193.192,-216.332 169.397,-216.332 169.012,-215.947 169.012,-214.249 169.012,-211.455 168.554,-210.998 168.529,-210.972 164.49,-210.972 156.239,-210.972 155.448,-210.182 155.448,-200.378 155.448,-198.78 157.328,-196.901 157.607,-196.621 163.855,-196.621 180.696,-196.621 181.864,-195.453 182.245,-195.072 182.245,-194.283 182.245,-139.903 183.388,-138.76 183.718,-138.43 186.106,-138.43 200.05,-138.43 200.939,-137.541 200.939,-133.96 200.939,-133.629 201.701,-132.867 201.752,-132.817 217.449,-132.817 217.88,-132.817 218.821,-131.876 218.821,-120.775 218.821,-120.498 218.11,-119.786 218.034,-119.71 210.947,-119.71 189.408,-119.71 188.468,-120.65 188.087,-121.031 188.087,-121.996 188.087,-122.047 187.096,-123.038 187.046,-122.987 185.522,-122.987 169.886,-122.987 168.859,-121.96 168.554,-121.655 168.554,-97.917 168.554,-95.961 169.901,-94.615 175.311,-89.205 181.432,-89.205
GND on GND "Top Layer-No Net" (solid, remove dead copper, pour order 1000): 194.64,-124.714 216.256,-124.714 216.256,-128.981 215.519,-129.718 215.265,-129.972 209.601,-129.972 200.709,-129.972 196.989,-133.692 195.223,-135.458 187.071,-135.458 180.467,-135.458 179.191,-136.734 177.648,-138.278 177.648,-148.996 177.648,-191.745 176.428,-192.964 175.895,-193.497 174.396,-193.497 150.618,-193.497 148.941,-195.174 148.996,-195.229 148.996,-200.025 148.996,-212.115 151.232,-214.351 156.794,-219.913 167.64,-219.913 178.587,-219.913 178.587,-232.41 -32.944,-232.41 -33.909,-231.445 -33.909,-227.914 -33.909,-227.051 103.073,-227.051 105.232,-224.892 106.426,-223.698 106.426,-213.944 106.426,-196.215 102.946,-192.735 86.15,-192.735 85.065,-192.735 82.728,-190.398 81.966,-189.636 81.966,-186.868 81.966,-174.473 79.66,-172.167 79.641,-172.187 56.693,-172.187 51.664,-172.187 49.581,-174.269 49.149,-174.701 49.149,-203.708 49.149,-212.827 47.066,-214.909 46.05,-215.925 9.677,-215.925 1.041,-215.925 -2.829,-212.055 -2.896,-211.988 -2.896,-141.859 2.845,-136.119 49.149,-136.119 51.816,-133.452 51.587,-133.223 51.587,-100.584 51.587,-96.926 52.273,-96.241 57.506,-91.008 159.36,-91.008 160.858,-89.51 163.144,-91.796 163.144,-102.616 163.144,-124.841 164.183,-125.88 164.44,-126.136 193.218,-126.136 194.64,-124.714
GND on Top Layer "Top Layer-No Net" (solid, remove dead copper, pour order 1001): 194.64,-124.714 216.256,-124.714 216.256,-128.981 215.519,-129.718 215.265,-129.972 209.601,-129.972 200.709,-129.972 196.989,-133.692 195.223,-135.458 187.071,-135.458 180.467,-135.458 179.191,-136.734 177.648,-138.278 177.648,-148.996 177.648,-191.745 176.428,-192.964 175.895,-193.497 174.396,-193.497 150.618,-193.497 148.941,-195.174 148.996,-195.229 148.996,-200.025 148.996,-212.115 151.232,-214.351 156.794,-219.913 167.64,-219.913 178.587,-219.913 178.587,-232.41 -32.944,-232.41 -33.909,-231.445 -33.909,-227.914 -33.909,-227.051 103.073,-227.051 105.232,-224.892 106.426,-223.698 106.426,-213.944 106.426,-196.215 102.946,-192.735 86.15,-192.735 85.065,-192.735 82.728,-190.398 81.966,-189.636 81.966,-186.868 81.966,-174.473 79.66,-172.167 79.641,-172.187 56.693,-172.187 51.664,-172.187 49.581,-174.269 49.149,-174.701 49.149,-203.708 49.149,-212.827 47.066,-214.909 46.05,-215.925 9.677,-215.925 1.041,-215.925 -2.829,-212.055 -2.896,-211.988 -2.896,-141.859 2.845,-136.119 49.149,-136.119 51.816,-133.452 51.587,-133.223 51.587,-100.584 51.587,-96.926 52.273,-96.241 57.506,-91.008 159.36,-91.008 160.858,-89.51 163.144,-91.796 163.144,-102.616 163.144,-124.841 164.183,-125.88 164.44,-126.136 193.218,-126.136 194.64,-124.714
AGND on Top Layer "Top Layer-No Net" (solid, remove dead copper, pour order 1002): 206.883,-240.513 210.337,-240.513 210.947,-239.903 214.935,-235.915 214.935,-232.207 214.935,-219.177 217.551,-216.56 223.495,-210.617 233.989,-210.617 236.753,-210.617 237.058,-210.312 250.419,-196.952 250.419,-106.375 250.419,-104.343 230.175,-84.099 227.203,-87.071 176.479,-87.071 173.507,-87.071 171.348,-89.23 168.91,-91.669 168.91,-106.375 168.91,-122.606 168.859,-122.657 187.729,-122.657 187.729,-119.789 187.757,-119.761 218.796,-119.761 218.796,-132.842 218.821,-132.867 201.113,-132.867 201.113,-138.256 200.939,-138.43 199.466,-138.43 182.122,-138.43 181.991,-138.561 182.245,-138.815 182.245,-196.458 156.119,-196.458 155.651,-196.926 155.27,-197.307 155.27,-199.06 155.27,-210.744 155.448,-210.922 155.6,-211.074 158.14,-211.074 168.783,-211.074 168.986,-211.277 168.961,-211.303 168.961,-212.877 168.961,-215.722 169.52,-216.281 169.697,-216.459 179.578,-216.459 196.012,-216.459 196.139,-216.586 196.317,-216.764 196.317,-219.126 196.317,-219.278 196.545,-219.507 196.621,-219.583 203.352,-219.583 205.613,-219.583 206.172,-220.142 206.223,-220.193 206.223,-222.961 206.223,-224.485 207.543,-225.806 209.398,-227.66 209.398,-230.454 209.398,-233.68 208.559,-234.518 208.28,-234.798 207.543,-234.798 -36.5,-234.798 -36.551,-234.848 -36.551,-223.266 99.847,-223.266 100.533,-222.58 100.355,-222.402 100.355,-214.757 100.355,-198.069 99.619,-197.333 79.502,-197.333 72.619,-197.333 71.958,-196.672 71.755,-196.469 71.755,-190.322 54.991,-190.322 54.153,-191.16 54.483,-191.491 54.483,-221.386 -58.166,-221.386 -58.344,-221.564 -58.598,-221.818 -58.598,-236.245 -54.839,-236.245 -50.14,-240.944 -50.267,-241.071 -50.267,-241.122 206.273,-241.122 206.883,-240.513
GND on Top Layer "Top Layer-No Net" (solid, remove dead copper, pour order 1003): 193.573,-122.047 216.789,-122.047 217.373,-122.631 217.472,-122.73 217.472,-124.689 217.472,-128.501 216.459,-129.515 215.923,-130.05 210.767,-130.05 193.774,-130.05 193.523,-130.302 193.573,-130.251 193.573,-122.047
AGND on Bottom Layer "Top Layer-No Net" (solid, remove dead copper, pour order 1014): 168.986,-89.611 169.393,-89.205 242.062,-89.205 242.062,-111.201 247.04,-116.18 246.837,-116.383 246.837,-208.534 243.307,-208.534 240.411,-211.43 239.7,-210.718 228.346,-210.718 224.409,-210.718 221.869,-213.258 214.147,-220.98 214.147,-225.628 214.147,-236.601 210.947,-239.801 209.855,-240.894 206.934,-240.894 -57.709,-240.894 -60.833,-237.769 -62.154,-236.449 -62.154,-222.301 -59.893,-222.301 -58.572,-220.98 -56.921,-219.329 7.315,-219.329 51.232,-219.329 53.797,-216.764 54.051,-216.51 54.051,-186.309 54.051,-183.337 55.651,-181.737 55.829,-181.559 69.901,-181.559 72.111,-181.559 72.72,-182.169 73.965,-183.413 73.965,-189.586 73.965,-193.015 76.505,-195.555 78.537,-197.587 86.995,-197.587 100.711,-197.587 101.067,-197.942 100.99,-198.018 100.99,-203.759 100.99,-222.58 100.025,-223.545 96.749,-223.545 -35.103,-223.545 -36.043,-224.485 -36.347,-224.79 -36.347,-225.984 -36.347,-234.036 -35.992,-234.391 -35.662,-234.721 -34.188,-234.721 207.924,-234.721 209.372,-233.274 209.398,-233.248 209.398,-227.559 209.398,-226.289 207.975,-224.866 206.502,-223.393 206.502,-219.888 206.4,-219.888 205.969,-219.456 200.05,-219.456 196.545,-219.456 196.113,-219.024 196.317,-218.821 196.317,-217.272 196.317,-217.043 195.834,-216.56 195.605,-216.332 193.192,-216.332 169.397,-216.332 169.012,-215.947 169.012,-214.249 169.012,-211.455 168.554,-210.998 168.529,-210.972 164.49,-210.972 156.239,-210.972 155.448,-210.182 155.448,-200.378 155.448,-198.78 157.328,-196.901 157.607,-196.621 163.855,-196.621 180.696,-196.621 181.864,-195.453 182.245,-195.072 182.245,-194.283 182.245,-139.903 183.388,-138.76 183.718,-138.43 186.106,-138.43 200.05,-138.43 200.939,-137.541 200.939,-133.96 200.939,-133.629 201.701,-132.867 201.752,-132.817 217.449,-132.817 217.88,-132.817 218.821,-131.876 218.821,-120.775 218.821,-120.498 218.11,-119.786 218.034,-119.71 210.947,-119.71 189.408,-119.71 188.468,-120.65 188.087,-121.031 188.087,-121.996 188.087,-122.047 187.096,-123.038 187.046,-122.987 185.522,-122.987 169.886,-122.987 168.859,-121.96 168.554,-121.655 168.554,-97.917 168.554,-95.961 169.901,-94.615 175.311,-89.205 181.432,-89.205
GND on Bottom Layer "Top Layer-No Net" (solid, remove dead copper, pour order 1004): 194.64,-124.714 216.256,-124.714 216.256,-128.981 215.519,-129.718 215.265,-129.972 209.601,-129.972 200.709,-129.972 196.989,-133.692 195.223,-135.458 187.071,-135.458 180.467,-135.458 179.191,-136.734 177.648,-138.278 177.648,-148.996 177.648,-191.745 176.428,-192.964 175.895,-193.497 174.396,-193.497 150.618,-193.497 148.941,-195.174 148.996,-195.229 148.996,-200.025 148.996,-212.115 151.232,-214.351 156.794,-219.913 167.64,-219.913 178.587,-219.913 178.587,-232.41 -32.944,-232.41 -33.909,-231.445 -33.909,-227.914 -33.909,-227.051 103.073,-227.051 105.232,-224.892 106.426,-223.698 106.426,-213.944 106.426,-196.215 102.946,-192.735 86.15,-192.735 85.065,-192.735 82.728,-190.398 81.966,-189.636 81.966,-186.868 81.966,-174.473 79.66,-172.167 79.641,-172.187 56.693,-172.187 51.664,-172.187 49.581,-174.269 49.149,-174.701 49.149,-203.708 49.149,-212.827 47.066,-214.909 46.05,-215.925 9.677,-215.925 1.041,-215.925 -2.829,-212.055 -2.896,-211.988 -2.896,-141.859 2.845,-136.119 49.149,-136.119 51.816,-133.452 51.587,-133.223 51.587,-100.584 51.587,-96.926 52.273,-96.241 57.506,-91.008 159.36,-91.008 160.858,-89.51 163.144,-91.796 163.144,-102.616 163.144,-124.841 164.183,-125.88 164.44,-126.136 193.218,-126.136 194.64,-124.714

## Keep-outs
Keep-Out Layer:
  lines w0.127: -49.244,-100.933 cw(c-47.244,-100.933) -47.244,-98.933 ; -49.228,-271.755 -49.228,-100.736 ; -49.219,-271.628 ccw(c-47.219,-271.628) -47.219,-273.628 232.594,-273.628 ; -47.424,-98.933 232.689,-98.933 ; 232.442,-273.628 ccw(c232.442,-271.628) 234.442,-271.628 ; 232.461,-98.933 cw(c232.461,-100.933) 234.461,-100.933 ; 234.442,-271.781 234.442,-100.686